# Altium PCB LED_Roulette_Wheel.PcbDoc
Units mil, origin at the board's own origin, x right, y up, seen from the top; angles counter-clockwise.
Board outline 2863.56 x 2863.56 mil, 2 copper layers (Top Layer, Bottom Layer); 24 components, 18 nets, 68 pads, 5 vias.
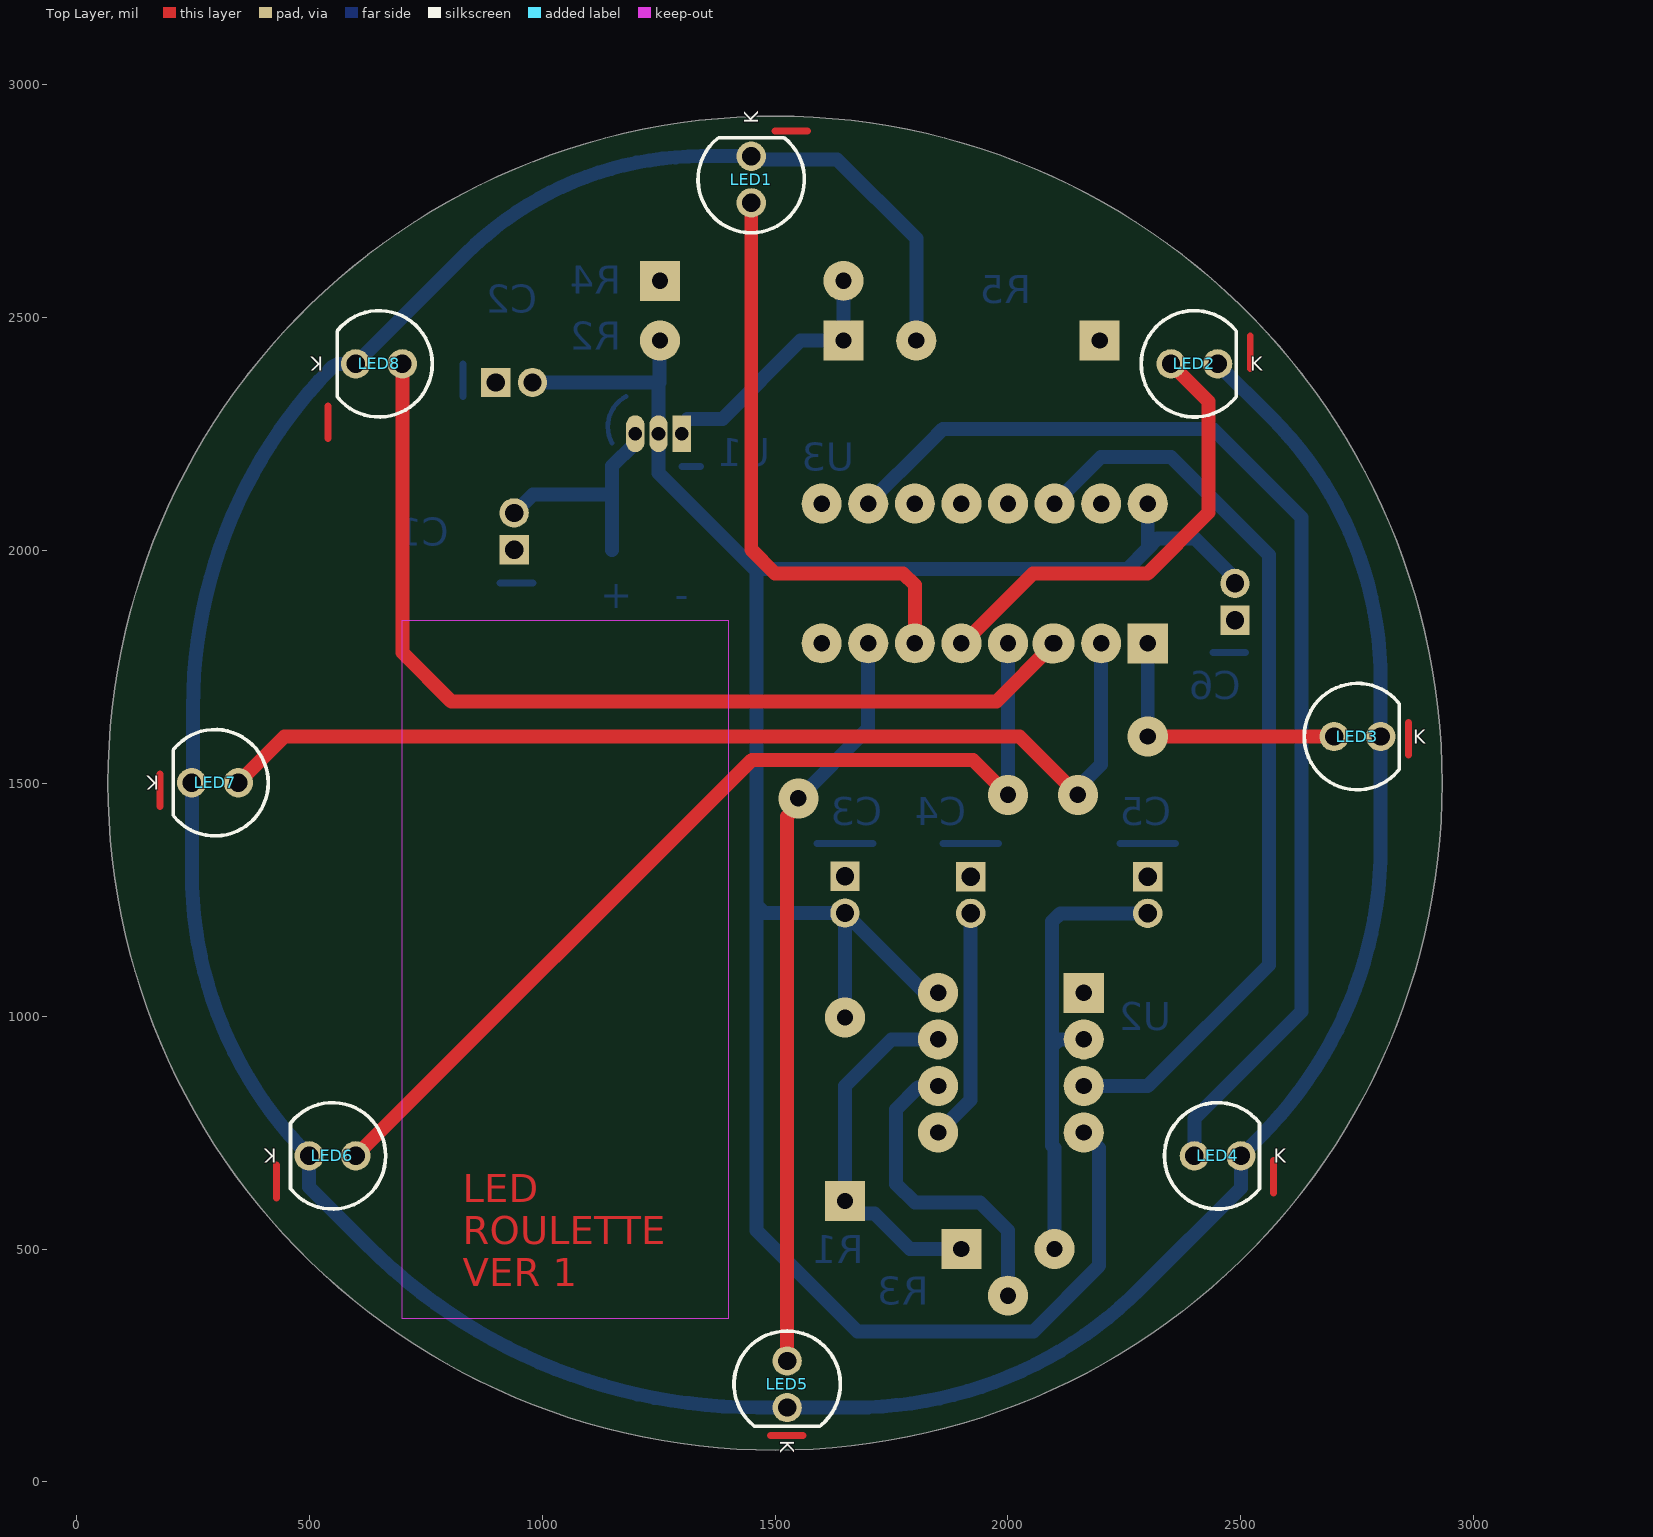
[diagram p0: Top Layer view]
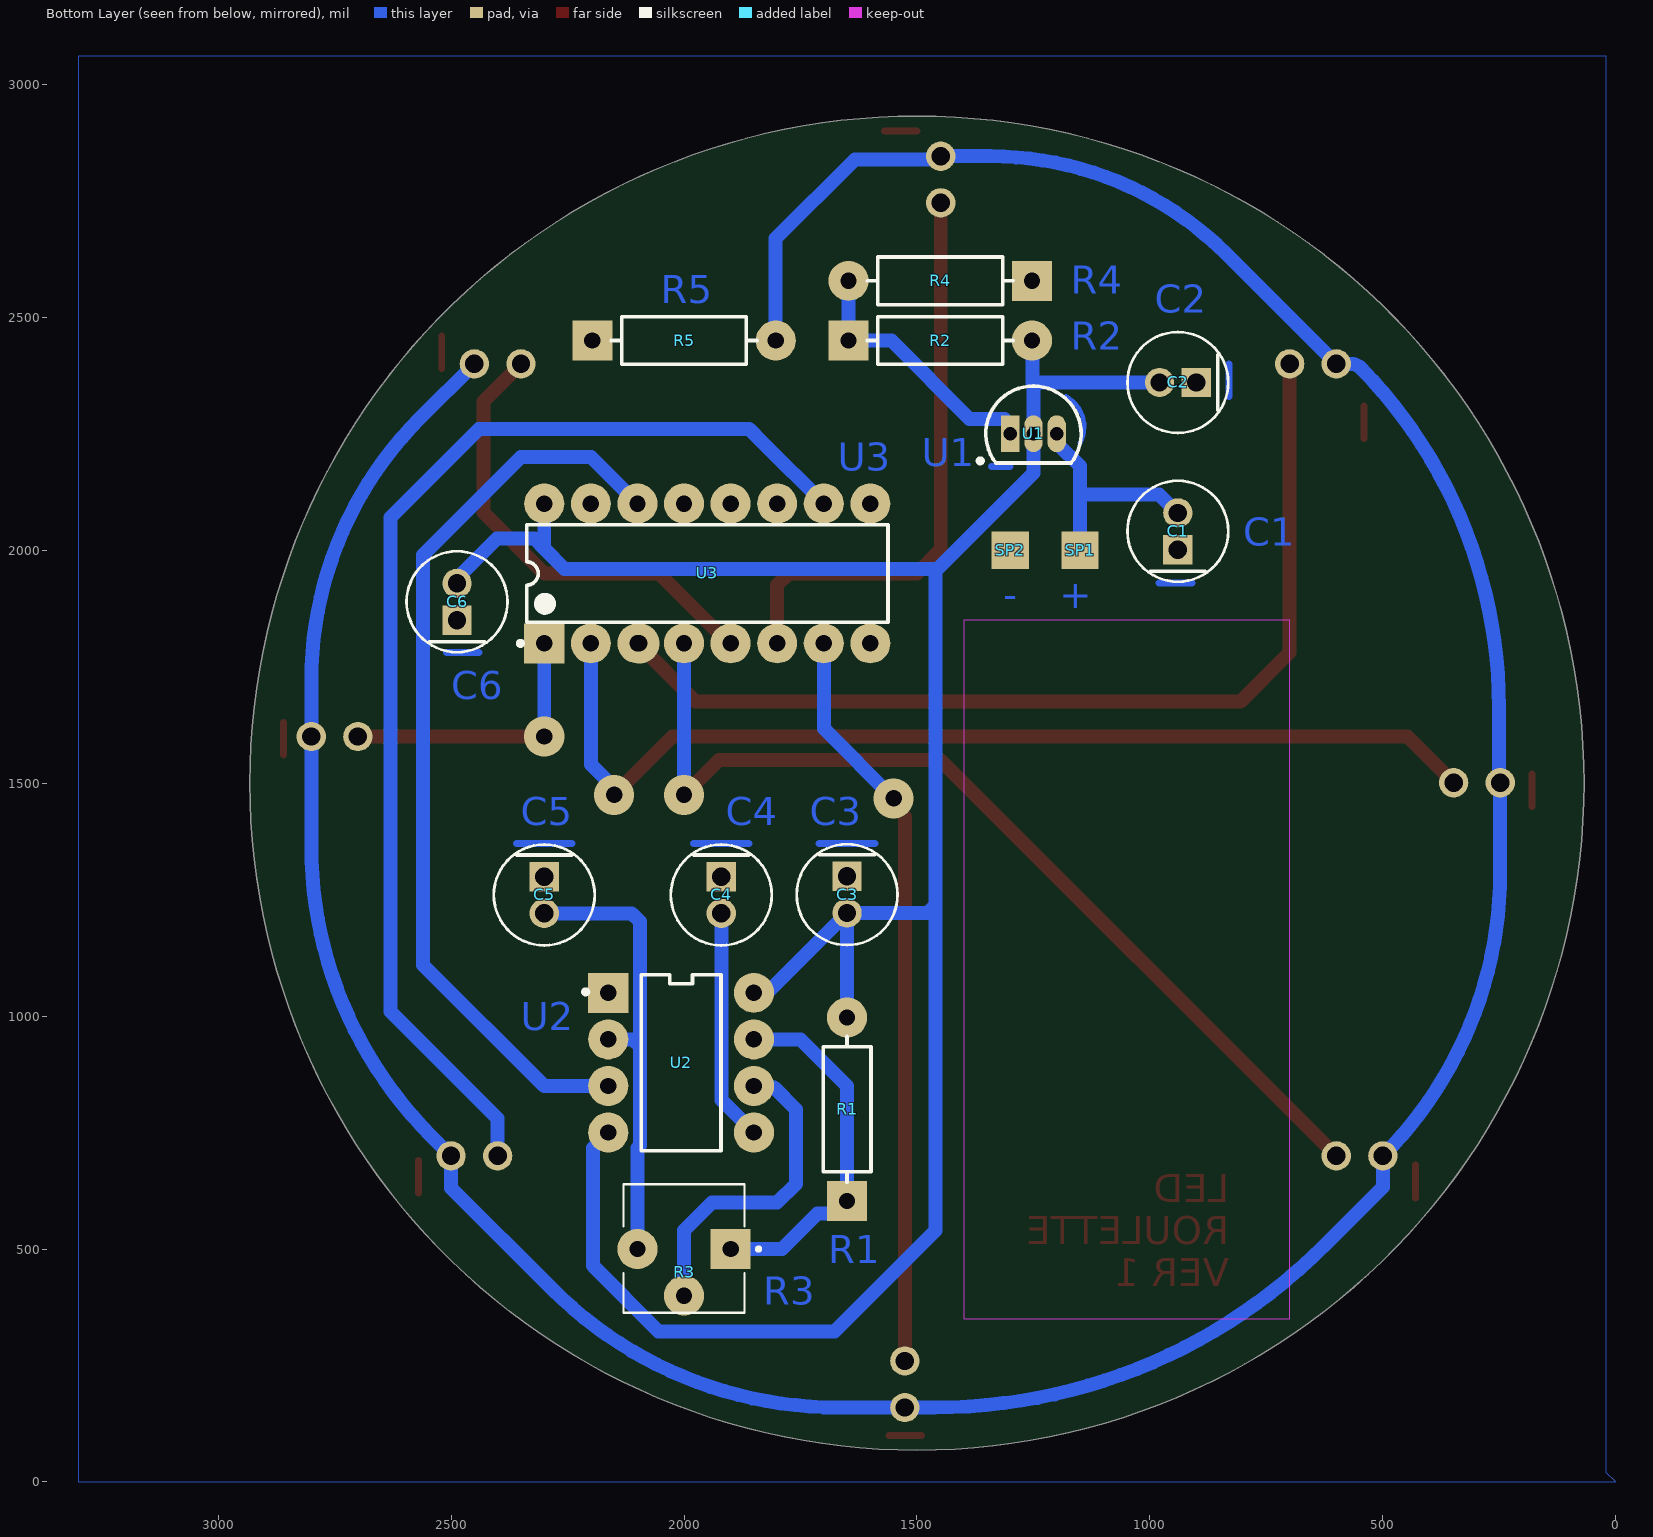
[diagram p1: Bottom Layer view, seen from below]
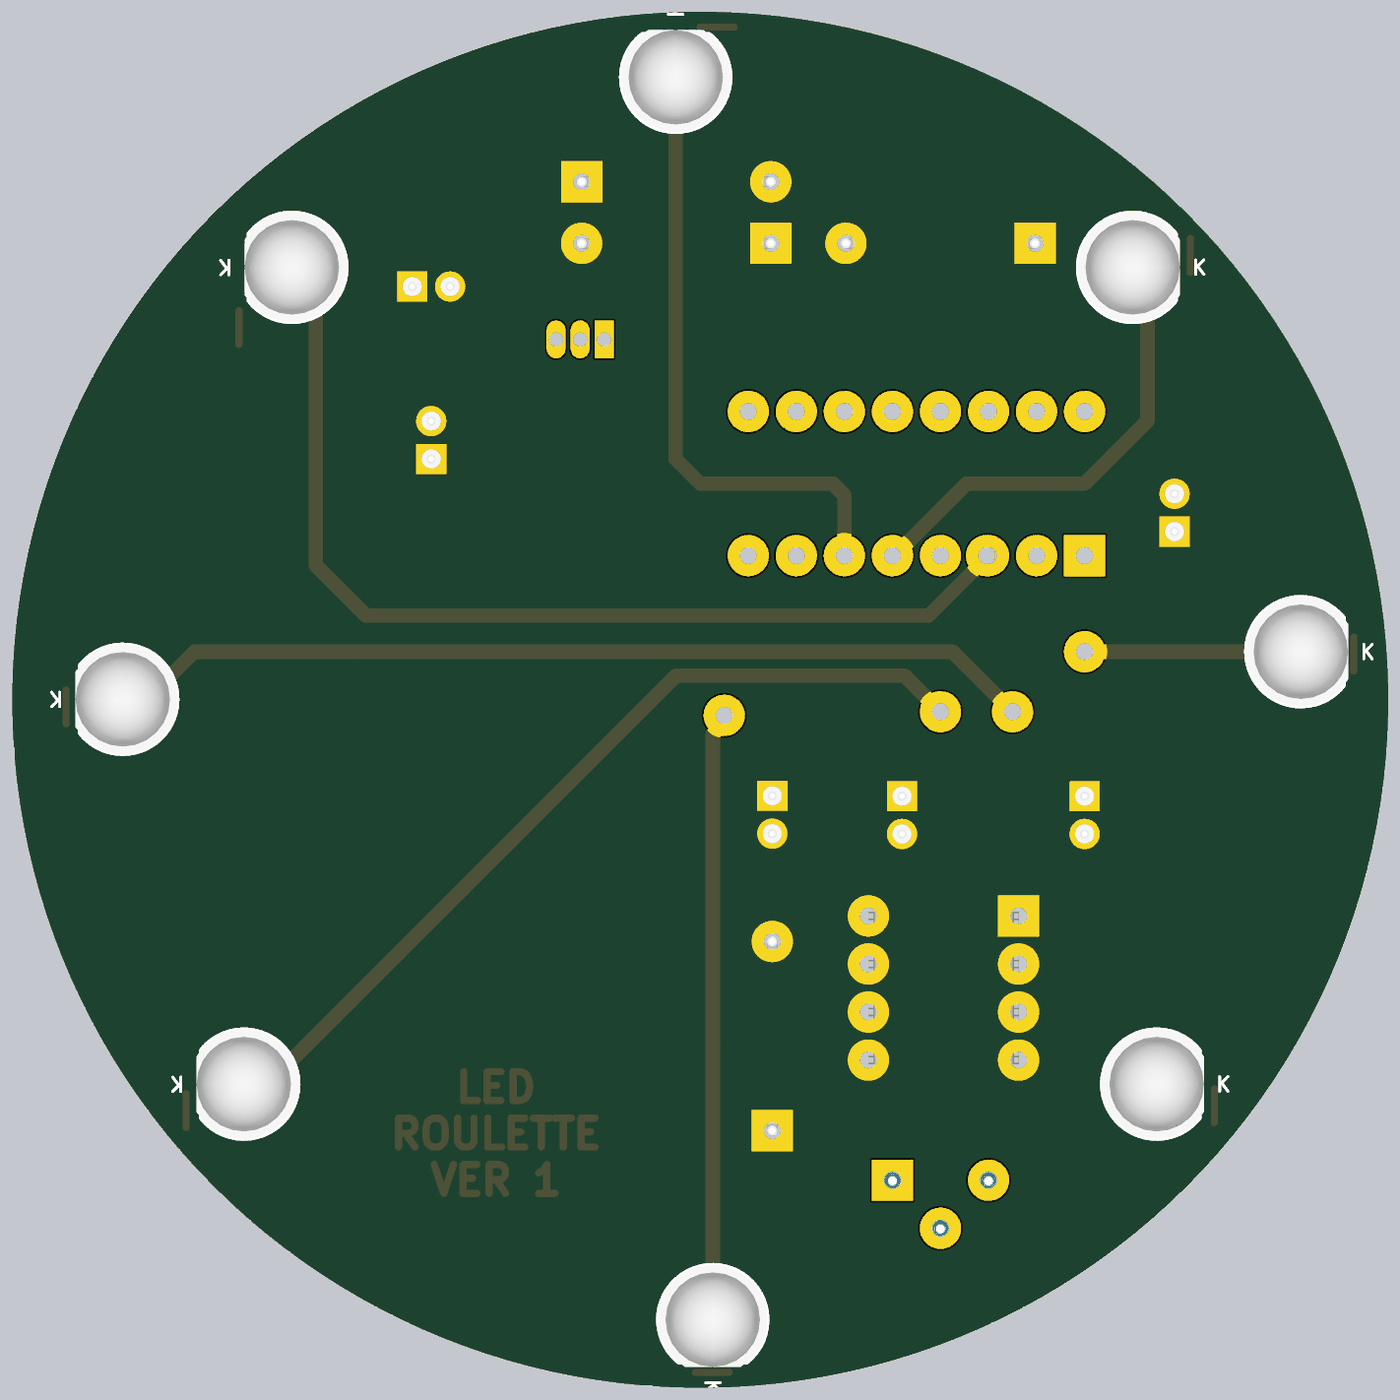
[diagram p2: 3D render of the assembled board from above, using the file's embedded part models]
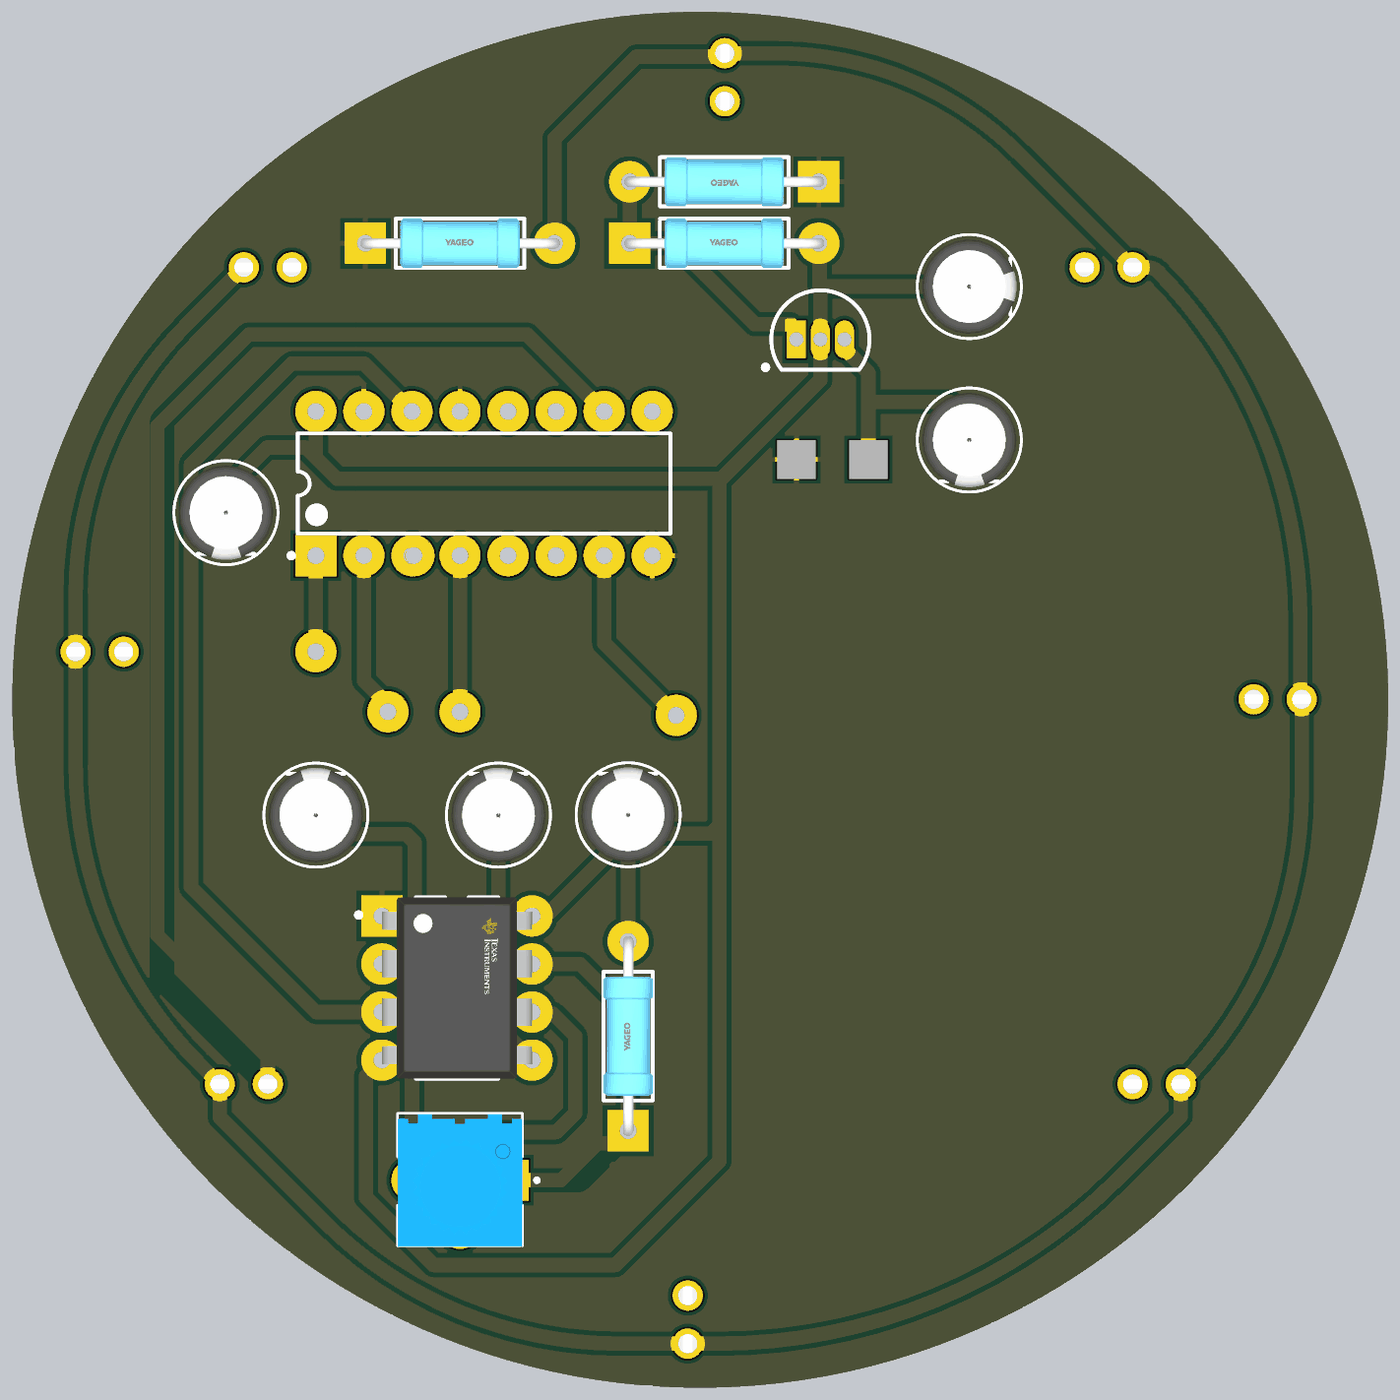
[diagram p3: 3D render of the assembled board from below, using the file's embedded part models]

## Layer stack, top to bottom
Top Solder: solder mask 0.4, Solder Resist, Dk 3.5
Top Layer: signal copper 1.4
Dielectric 1: dielectric 12.6, FR-4, Dk 4.8
Bottom Layer: signal copper 1.4
Bottom Solder: solder mask 0.4, Solder Resist, Dk 3.5

## Board outline
1500,68.22 cw(c1500,1500) 68.22,1500 cw(c1500,1500) 1500,2931.78 cw(c1500,1500) 2931.78,1500 cw(c1500,1500)

## Design rules (kind name [scope] priority, off if disabled: settings)
Clearance [All] p1: gap=10 ignorepadtopadclearanceinfootprint=FALSE except(0: Arc-Hole Track-Hole SMDPad-Hole THPad-Hole Via-Hole Fill-Hole Poly-Hole Region-Hole Text-Hole)
PolygonConnect [All] p1: connectstyle=Relief reliefconductorwidth=10 reliefentries=4 polygonreliefangle="90 Angle" airgapwidth=10
RoutingVias [All] p1: holewidth=28 width=50 viastyle="Through Hole" minholewidth=28 minwidth=50 maxholewidth=28 maxwidth=50
SolderMaskExpansion [All] p1: expansion=4 istentingtop=FALSE
Width [All] p1: maxlimit=35 minlimit=12 preferedwidth=15
30 further rules are at their usual default settings.

## Components (designator, comment, footprint, x,y, rotation, side; value= is the part's Value field where it differs from the comment)
C1 "0.1uF" FP-UPW1E220MDD-MFG 940,2040.63 r90 bottom value=22uF
C2 "1uF" FP-UPW1E220MDD-MFG 940,2360 r0 bottom value=22uF
C3 "1uF" FP-UPW1E220MDD-MFG 1650,1260.63 r270 bottom value=22uF
C4 "0.1uF" FP-UPW1E220MDD-MFG 1920,1260 r270 bottom value=22uF
C5 "10uF" FP-UPW1E220MDD-MFG 2300,1260 r270 bottom value=22uF
C6 "1uF" FP-UPW1E220MDD-MFG 2487.18,1889.37 r90 bottom value=22uF
LED1 "151051VS04000" "Type 5mm" 1448.92,2795.6 r90 top
LED2 "151051VS04000" "Type 5mm" 2400,2400 r0 top
LED3 "151051VS04000" "Type 5mm" 2750,1600 r0 top
LED4 "151051VS04000" "Type 5mm" 2450,700 r0 top
LED5 "151051VS04000" "Type 5mm" 1526.03,209.84 r270 top
LED6 "151051VS04000" "Type 5mm" 550,700 r180 top
LED7 "151051VS04000" "Type 5mm" 298.08,1500.95 r180 top
LED8 "151051VS04000" "Type 5mm" 650,2400 r180 top
R1 "3.3k" FP-MFR-25-MFG 1650,800 r90 bottom value=1.18kΩ
R2 "3.3k" FP-MFR-25-MFG 1450,2450 r180 bottom value=1.18kΩ
R3 "10 kOhms" TRIM_3362P-1-104TLF 2000,500 r0 bottom
R4 "10k" FP-MFR-25-MFG 1450,2578.12 r0 bottom value=1.18kΩ
R5 "220" FP-MFR-25-MFG 2000,2450 r180 bottom value=1.18kΩ
SP1 "Pad" SP 1150,2000 r180 bottom
SP2 "Pad" SP 1300,2000 r180 bottom
U1 "LM317LZ" Z03A 1250,2250 r270 bottom
U2 "LM555CN/NOPB" FP-P0008A-MFG 2006.3,900 r180 bottom
U3 "CD4017BE" N0016A 1950,1950 r90 bottom

## Footprints (in the part's own frame and the unit in brackets; to place one, negate y for a bottom-side part, rotate by r counter-clockwise, add the part's x,y. Pads: shape width x height; smd on the part's side, far side on the other; paste and mask are expansions set on the pad)
FP-MFR-25-MFG [mil]
  rect 86x86 hole 35 paste-39370.1 mask+0: 1(-196.85,0)
  round 86 hole 35 paste-39370.1 mask+0: 2(196.85,0)
  silkscreen extent -156,-51 156,51, body extent -208,-51 208,51, height 102
FP-P0008A-MFG [mil]
  rect 86x86 hole 35 paste-39370.1 mask+0: 1(-156.3,150)
  round 86 hole 35 paste-39370.1 mask+0: 2(-156.3,50) 3(-156.3,-50) 4(-156.3,-150) 5(156.3,-150) 6(156.3,-50) 7(156.3,50) 8(156.3,150)
  silkscreen extent -210,-189 86,189, body extent -156,-189 156,189, height 200
FP-UPW1E220MDD-MFG [mm]
  rect 1.6x1.6 hole 1 paste-1000 mask+0: 1(-1,0)
  round 1.6 hole 1 paste-1000 mask+0: 2(1,0)
  silkscreen extent -2.75,-2.75 2.75,2.75, body extent -2.5,-2.5 2.5,2.5, height 12.5
N0016A [mil] "DIP, 16-Leads, Body 19.7x6.6mm, Pitch 2.54mm"
  rect 86x86 hole 35.43: 1(-150,350)
  round 86 hole 35: 2(-150,250) 3(-150,150) 4(-150,50) 5(-150,-50) 6(-150,-150) 7(-150,-250) 8(-150,-350) 9(150,-350) 10(150,-250) 11(150,-150) 12(150,-50) 13(150,50) 14(150,150) 15(150,250) 16(150,350)
  silkscreen extent -155,-388 104,406, body extent -155,-388 155,388, height 200
SP [mil]
  rect 80x80 smd: 1(0,0)
TRIM_3362P-1-104TLF [mil]
  rect 86x86 hole 35: 1(-100,0)
  round 86 hole 35: 2(0,100) 3(100,0)
  silkscreen extent -164,-139 130,137, body extent -130,-138 130,138, height 583
"Type 5mm" [mm] "THT, LED-5mm, 2pin- Body 5.8mm"
  round 1.6 hole 1: 1(1.27,0) 2(-1.27,0)
  silkscreen extent -2.9,-2.9 2.29,2.9, body extent -2.9,-2.9 2.5,2.9, height 11.7
Z03A [mm] "TO, Flat Index; 3 In-Line, Axial Leads; Body Dia. 5mm; Leads 0.55 x 0.50 mm (max)"
  rect 2x1 hole 0.75: 1(0,-1.27)
  oval 2x1 hole 0.75: 2(0,0) 3(0,1.27)
  silkscreen extent -2.6,-3.03 1.6,2.6, body extent -2.6,-2.61 1.6,2.61, height 5.2

## Part data
C1 C2 C3 C4 C5 C6: library part CMP-12462-000010-1, "CAP ALUM 22UF 20% 25V RADIAL", Capacitance=22uF, Leakage Current=16.5uA, Manufacturer=Nichicon, Manufacturer Part Number=UPW1E220MDD, Package=0, Ripple Current=180mA, Temperature="-55°C to +105°C", Temperature Range High=+105°C, Temperature Range Low=-55°C, Tolerance=20%, Voltage Rating=25V, Automotive=Yes, Automotive Grade="Grade 2", Category=Cap, ComponentLink2Description=Datasheet, ComponentLink2URL=https://products.nichicon.co.jp/en/pdf/XJA043/e-upw.pdf, Device Class L1="Passive Components", Device Class L2=Capacitors, Device Class L3="Aluminum Electrolytic Capacitors", Digikey Description="CAP ALUM 22UF 20% 25V RADIAL", Dissipation Factor=14%, Height=12.5mm, Lead Free=Yes, Life=2000Hours, Material=Aluminum, Octopart=https://octopart.com/upw1e220mdd-nichicon-202818, RoHS=TRUE
LED1 LED2 LED3 LED4 LED5 LED6 LED7 LED8: library part CMP-1488-00007-1, "THT LED round mono-color color lens, WL-TMRW, Bright Green", Emitting color="Bright Green", Manufacturer="Wuerth Elektronik", ComponentLink1Description="Manufacturer URL", ComponentLink1URL=http://www.we-online.com, ComponentLink2Description=Datasheet, ComponentLink2URL=http://katalog.we-online.de/pbs/datasheet/7448042001.pdfhttp://katalog.we-online.de/pbs/datasheet/7448042001.pdfhttp://katalog.we-online.de/pbs/datasheet/7448042001.pdfhttp://katalog.we-online.de/pbs/datasheet/151051VS04000.pdf, PackageReference="Type 5mm", PartNumber=151051VS04000
R1 R2 R4 R5: library part CMP-03413-000001-1, "RES 1.18K OHM 1/4W 1% AXIAL", Manufacturer=Yageo, Manufacturer Part Number=MFR-25FBF52-1K18, Package=MFR-25, Power Rating=0.25W, Resistance=1.18kΩ, Temperature="-55°C to +155°C", Temperature Coefficient=100ppm/°C, Temperature Range High=+155°C, Temperature Range Low=-55°C, Tolerance=1%, Voltage Rating=250V, Automotive=No, Category=Res, ComponentLink2Description=Datasheet, ComponentLink2URL=https://www.yageo.com/upload/media/product/products/datasheet/lr/Yageo_LR_MFR_1.pdf, Composition="Metal Film", Device Class L1="Passive Components", Device Class L2=Resistors, Device Class L3="Through-Hole Resistors", Digikey Description="RES 1.18K OHM 1/4W 1% AXIAL", Height=2.6mm, Ipc Land Pattern Name=RESAD1000W75L680D260, Lead Free=Yes, Mouser Description="Metal Film Resistors 1.18K OHM 1/4W 1%", Octopart=https://octopart.com/mfr-25fbf52-1k18-yageo-56251681, RoHS=TRUE, Series=MFR
R3: library part 3362P-1-104TLF, "10 kOhms 0.5W, 1/2W PC Pins Through Hole Trimmer Potentiometer Cermet 1 Turn Top Finger Adjustment", Package="3362P-1-T Bourns Inc.", Availability=Warning, Check_prices=https://www.snapeda.com/parts/3362P-1-104TLF/Bourns/view-part/1448275/?ref=eda, MF=Bourns, MP=3362P-1-104TLF, Price=None, Purchase-URL=https://pricing.snapeda.com/search/part/3362P-1-104TLF/?ref=eda, SnapEDA_Link=https://www.snapeda.com/parts/3362P-1-104TLF/Bourns/view-part/1448275/?ref=snap
SP1 SP2: library part SP
U1: library part CMP-0062-00072-2, "3-Terminal Adjustable Regulator, 3-pin TO-92", Manufacturer="National Semiconductor", PackageTopMarking=NSXYTT*LM317*LZ, PowerWise=N, Code_JEDEC=TO-226-AA, ComponentLink1Description="LM317L Datasheet", ComponentLink1URL=http://www.national.com/ds/LM/LM317L.pdf, ComponentLink2Description="LM317L Web Page", ComponentLink2URL=http://www.national.com/pf/LM/LM317L.html, ComponentLink3Description="Z03A Package Page", ComponentLink3URL=http://www.national.com/packaging/folders/z03a.html, CompType="LDO IC", DatasheetVersion=Apr-2008, PackageDescription="TO-92, Molded, 3 Lead", PackageReference=Z03A, PackageVersion="revG, Sep-2000", PinCount=3, RevisionNote="Component URLs added", RoHS=N
U2: library part CMP-0056-00016-4, "IC OSC SINGLE TIMER 100KHZ 8-DIP", Ambient Temperature Range High=+70°C, Ambient Temperature Range Low=0°C, Manufacturer="Texas Instruments", Max Supply Voltage=16V, Min Supply Voltage=4.5V, Nominal Supply Current=3mA, Package=P0008A, Temperature="0°C to +70°C", Automotive=No, Category=IC, ComponentLink2Description=Datasheet, ComponentLink2URL=http://www.ti.com/lit/ds/symlink/lm555.pdf, Device Class L1="Integrated Circuits (ICs)", Device Class L2="Clock and Timing", Device Class L3="Timers and Oscillators", Digikey Description="IC OSC SINGLE TIMER 100KHZ 8-DIP", Height=5.08mm, Lead Free=Yes, Manufacturer Part Number=LM555CN/NOPB, Max Junction Temp=+70°C, Number Of Timers/Counters=1, Octopart=https://octopart.com/lm555cn%2Fnopb-texas+instruments-24814897, RoHS=TRUE, Standoff Height=0.51mm, Temperature Range High=+70°C, Temperature Range Low=0°C
U3: library part CMP-1623-00541-2, "CMOS Decade Counter with 10 Decoded Outputs, N0016A, TUBE", F @ Nom Voltage(Max)(Mhz)=8, Generic Part Number=CD4017B, ICC @ Nom Voltage(Max)(mA)=0.03, Manufacturer="Texas Instruments", Operating Temperature Range(C)="-55 to 125", Rating=Military, tpd @ Nom Voltage(Max)(ns)=270, Voltage(Nom)(V)=10, Bits(#)=10, Code_JEDEC=MS-001, DatasheetVersion=SCHS027C, Function=Counter, Input Type=CMOS, Inputs=1, Output Drive (IOL/IOH)(Max)(mA)=1.5/-1.5, Output Type=CMOS, PackageReference=N0016A, Schmitt Trigger=No, Technology Family=CD4000, Type=Decade, VCC(Max)(V)=18, VCC(Min)(V)=3

## Via types
v1: diameter 86, hole 35, Top Layer to Bottom Layer, 5 vias

## Nets (pads, with @x,y where several pads share a name; then routed paths per layer and width w, separated by ;. In a path a pad name is that pad's centre, name@x,y a point inside that pad or via, vN(x,y) a via of type N, cw(c..) or ccw(c..) an arc to the next point about the centre after c; other vN are vias at no path point)
+5V: C2.2 C3.2 C6.2 R1.2 R2.2 U1.2 U2.4 U2.8 U3.16 | length 5328.7
  Bottom Layer w10: R2.2@1251.57,2448.43 R2.2
  Bottom Layer w15: 1240,2360 1250,2350
  Bottom Layer w30: C2.2 1240,2360 ; 1250,2350 U1.2 1250,2165.36 1460,1955.36 1460,1238.83 ; 1251.57,2360 R2.2@1251.57,2448.43 ; 1455.36,1960 2256.17,1960 2300,2003.83 ; R1.2 C3.2 ; U2.8 1846.32,1053.68 1817.58,1053.68 C3.2 ; U2.4 2195.69,716.91 2195.69,464.14 2054.95,323.4 1676.6,323.4 1460,540 1460,1238.83 ; U3.16 2300,2003.83 ; C6.2@2487.18,1939.37 2401.55,2025 2321.17,2025 2300,2003.83 ; 1460,1238.83 1477.57,1221.26 C3.2
+VBAT: C1.2 SP1.1 U1.3 | length 497.3
  Bottom Layer w30: C1.2 980,2120 1080,2120 1150,2120 ; SP1.1 1150,2120 ; U1.3 1196.94,2246.94 1196.94,2227.25 1150,2180.32 1150,2120
CLK: U2.3 U3.14 | length 1973.5
  Bottom Layer w30: U3.14 2200,2200 2350,2200 2560,1990 2560,1110 2300,850 U2.3
GND: C1.1 C2.1 C3.1 C4.1 C5.1 C6.1 R4.1 R5.1 SP2.1 U2.1 U3.8 U3.13 U3.15
NetC4_2: C4.2 U2.5 | length 499.6
  Bottom Layer w30: U2.5 1920,820 C4.2
NetC5_2: C5.2 R3.3 U2.2 | length 992.4
  Bottom Layer w30: R3.3 2100,716.43 2094.6,721.83 2094.6,934.6 ; U2.2 2110,950 2094.6,934.6 ; C5.2 2112.17,1220.63 2094.6,1203.06 2094.6,934.6
NetLED1_1: LED1.1 LED2.1 LED3.1 LED4.1 LED5.1 LED6.1 LED7.1 LED8.1 R5.2 | length 7876
  Bottom Layer w30: 547.32,2391.11 ccw(c1292.32,1663.5) 250.96,1663.5 250.96,1663.39 250.96,1503.83 LED7.1 248.08,1308.3 248.08,1308.22 ccw(c1108.19,1308.19) LED6.1 500,633.38 627.85,505.53 ccw(c1462.31,1339.83) 1462.42,159.84 LED5.1 1668.17,159.84 ccw(c1668.28,1030.03) 2283.65,414.77 2500,631.11 LED4.1 2541.81,741.81 ccw(c1918.67,1365.06) 2800,1365.09 2800,1365.17 LED3.1 2800,1720 2800,1720.07 ccw(c2003.56,1720.1) 2566.62,2283.38 LED2.1 ; 547.33,2391.11 cw(c568.64,2370) 568.64,2400 LED8.1 835.53,2635.53 cw(c1342.59,2128.6) 1342.63,2845.6 1342.7,2845.6 LED1.1 cw(c1448.92,2821.49) 1448.99,2845.6 1449.59,2845.54 cw(c1446.52,2815.7) 1465.97,2838.54 1633.31,2838.54 1803.15,2668.7 R5.2
NetLED1_2: LED1.2 U3.6 | length 1252.1
  Top Layer w30: LED1.2 1448.92,2001.08 1500,1950 1775,1950 1800,1925 U3.6
NetLED2_2: LED2.2 U3.5 | length 1001.4
  Top Layer w30: U3.5@1900,1796.17 2053.83,1950 2300,1950 2430.88,2080.88 2430.88,2319.12 LED2.2
NetLED3_2: LED3.2 U3.1 | length 600
  Top Layer w30: v1(2300,1600) LED3.2
  Bottom Layer w30: v1(2300,1600) U3.1
NetLED4_2: LED4.2 U3.10 | length 2540.2
  Bottom Layer w30: U3.10 1831.12,2231.12 1860,2260 2440,2260 2630,2070 2630,1010 2400,780 LED4.2
NetLED5_2: LED5.2 U3.7 | length 1612.2
  Top Layer w30: LED5.2 1526.03,1428.3 1550,1452.27 v1(1550,1467.42)
  Bottom Layer w30: v1(1550,1467.42) 1700,1617.42 U3.7
NetLED6_2: LED6.2 U3.4 | length 2108.1
  Top Layer w30: LED6.2 1450,1550 1925,1550 v1(2000,1475)
  Bottom Layer w30: v1(2000,1475) U3.4
NetLED7_2: LED7.2 U3.2 | length 2240.4
  Top Layer w30: LED7.2 447.13,1600 2025,1600 v1(2150,1475)
  Bottom Layer w30: v1(2150,1475) 2150,1490.15 2200,1540.15 U3.2
NetLED8_2: LED8.2 U3.3 | length 2117.6
  Top Layer w30: LED8.2 700,1780 805,1675 1975,1675 2096,1796 v1(2096,1800)
  Bottom Layer w30: v1(2096,1800) U3.3
NetR1_1: R1.1 R3.1 U2.7 | length 781
  Bottom Layer w30: U2.7 1750,950 1650,850 R1.1 1676.39,576.76 1713.24,576.76 1790,500 R3.1
NetR2_1: R2.1 R4.2 U1.1 | length 569.3
  Bottom Layer w30: U1.1 1300,2269.68 1312.19,2281.87 1386.9,2281.87 1555.03,2450 R2.1 R4.2
NetR3_2: R3.2 U2.6 | length 692.1
  Bottom Layer w30: U2.6 1846.32,846.32 1806.32,846.32 1760,800 1760,640 1800,600 1940,600 2000,540 R3.2
pads on no net: U3.9 U3.11 U3.12
copper on no net: | length 1286
  Top Layer w15: 180,1450 180,1520 ; 430,610 430,680 ; 540,2240 540,2310 ; 1490,100 1560,100 ; 1500,2900 1570,2900 ; 2520,2390 2520,2460 ; 2570,620 2570,690 ; 2860,1560 2860,1630
  Bottom Layer w10: 1150,2230 cw(c1215,2265) 1180,2330
  Bottom Layer w15: 830,2330 830,2400 ; 910,1930 980,1930 ; 1300,2180 1340,2180 ; 1590,1370 1710,1370 ; 1860,1370 1980,1370 ; 2240,1370 2360,1370 ; 2440,1780 2510,1780

## Polygon pours and split planes (outlines as drawn)
GND on Bottom Layer "NONET_L02_P000" (solid, shelved, pour order 0): 0,0 20,20 20,3060 3300,3060 3300,0

## Keep-outs
Keep-Out Layer:
  region: 1400,350 700,350 700,1850 1400,1850

## Other copper
Top Layer:
  text "LED  / ROULETTE / VER 1" at 830,420 h60
Bottom Layer:
  text "+" at 1125,1875 h60
  text "-" at 1285,1875.01 h60

## Silkscreen, mask and mechanical layers (free items; w line width, h text height)
Bottom Overlay:
  lines w3: 1590.94,1346.26 1709.06,1346.26
Mechanical 1:
  circle w10: c1500,1500 r1431.78

## Text inside footprints (layer, text, board x,y; h text height)
LED1: Top Overlay "K" at 1463.92,2915.6 h30 r90; Top Courtyard "K" at 1463.92,2915.6 h30 r90
LED2: Top Overlay "K" at 2520,2385 h30; Top Courtyard "K" at 2520,2385 h30
LED3: Top Overlay "K" at 2870,1585 h30; Top Courtyard "K" at 2870,1585 h30
LED4: Top Overlay "K" at 2570,685 h30; Top Courtyard "K" at 2570,685 h30
LED5: Top Overlay "K" at 1511.03,89.84 h30 r270; Top Courtyard "K" at 1511.03,89.84 h30 r270
LED6: Top Overlay "K" at 430,715 h30 r180; Top Courtyard "K" at 430,715 h30 r180
LED7: Top Overlay "K" at 178.08,1515.95 h30 r180; Top Courtyard "K" at 178.08,1515.95 h30 r180
LED8: Top Overlay "K" at 530,2415 h30 r180; Top Courtyard "K" at 530,2415 h30 r180